# Altium PCB 原理图.PcbDoc
Units mil, origin at the board's own origin, x right, y up, seen from the top; angles counter-clockwise.
Board outline 4545 x 3980 mil, 2 copper layers (Top Layer, Bottom Layer); 26 components, 47 nets, 185 pads, 12 vias.
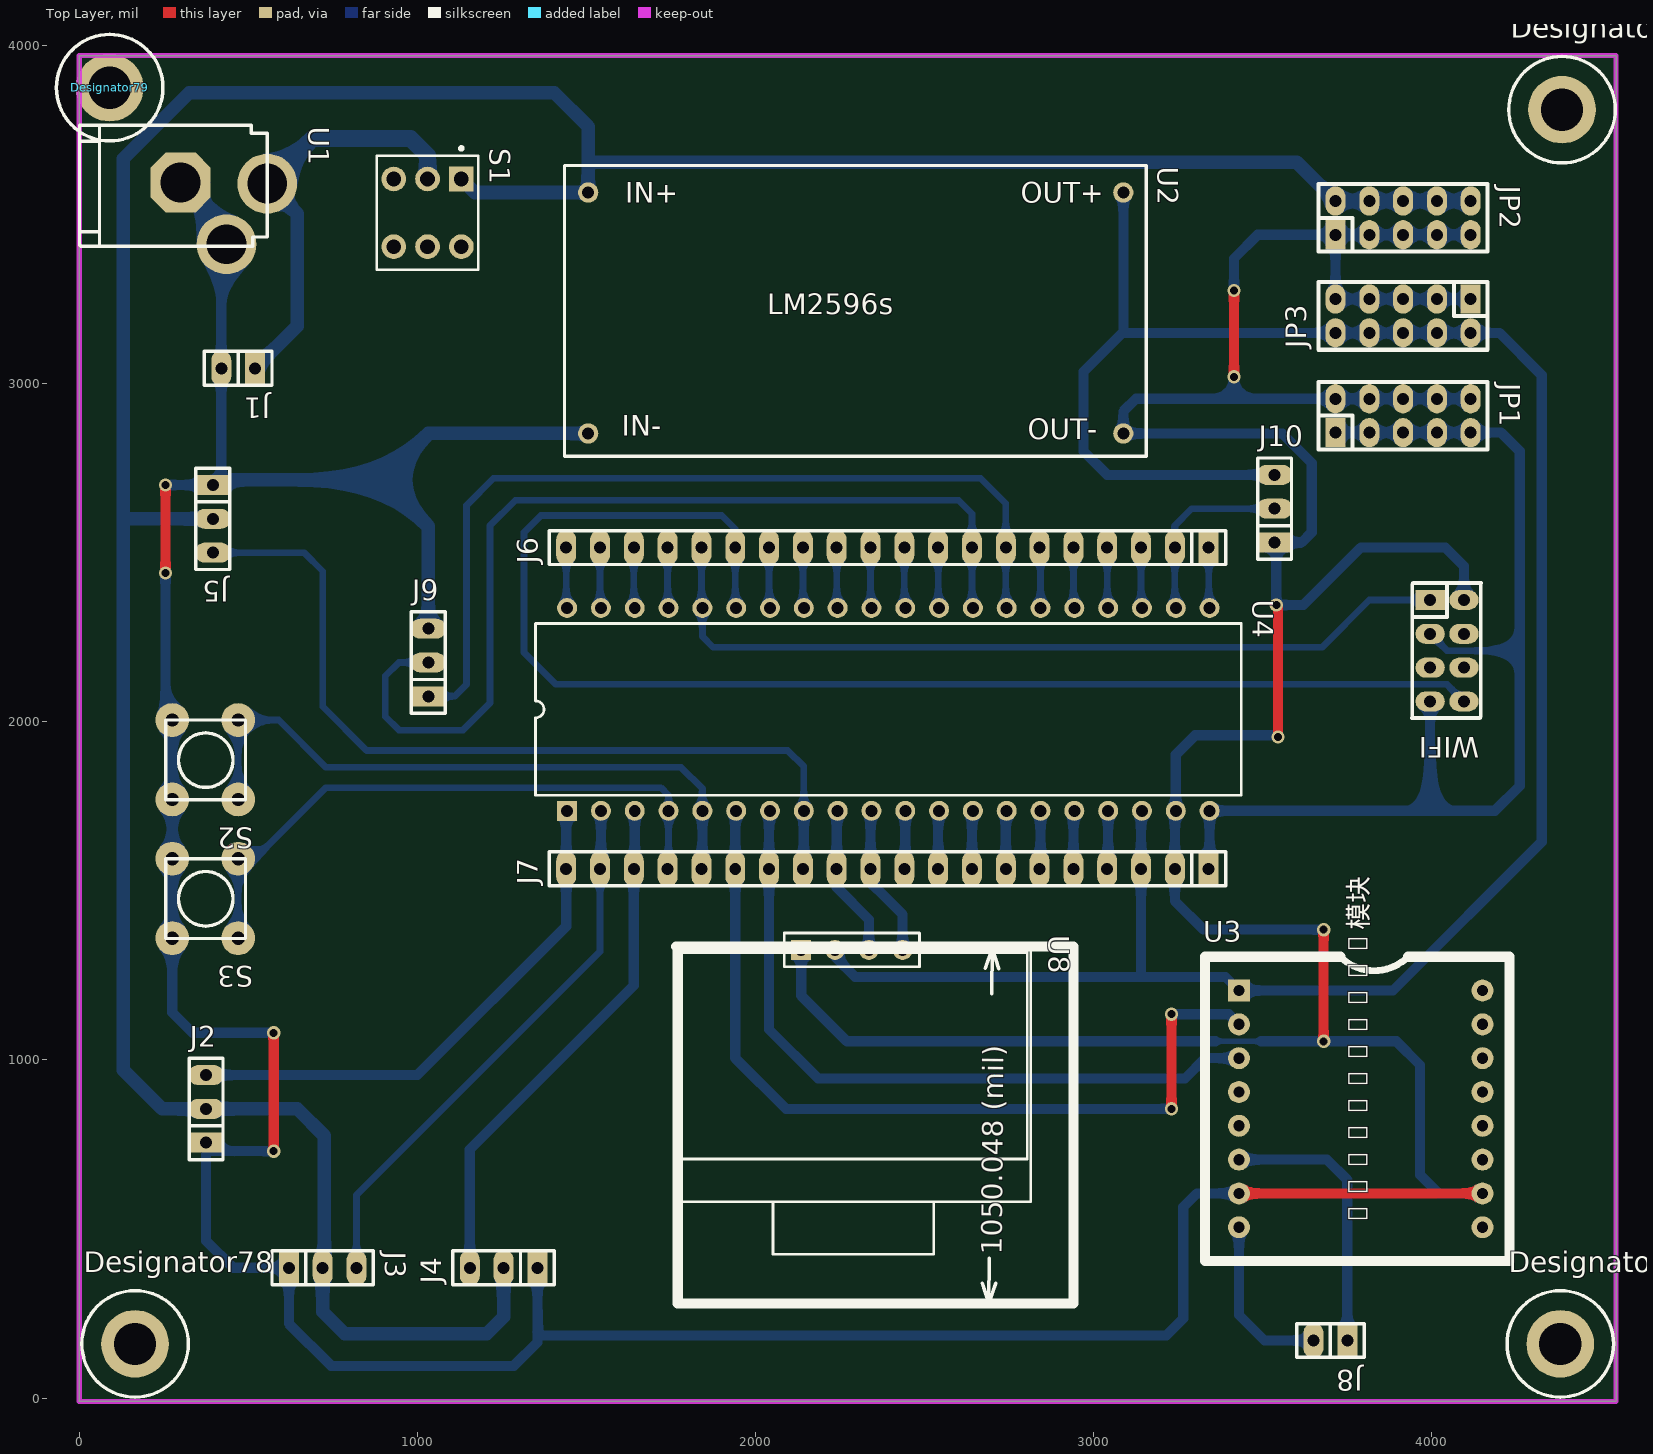
[diagram p0: Top Layer view]
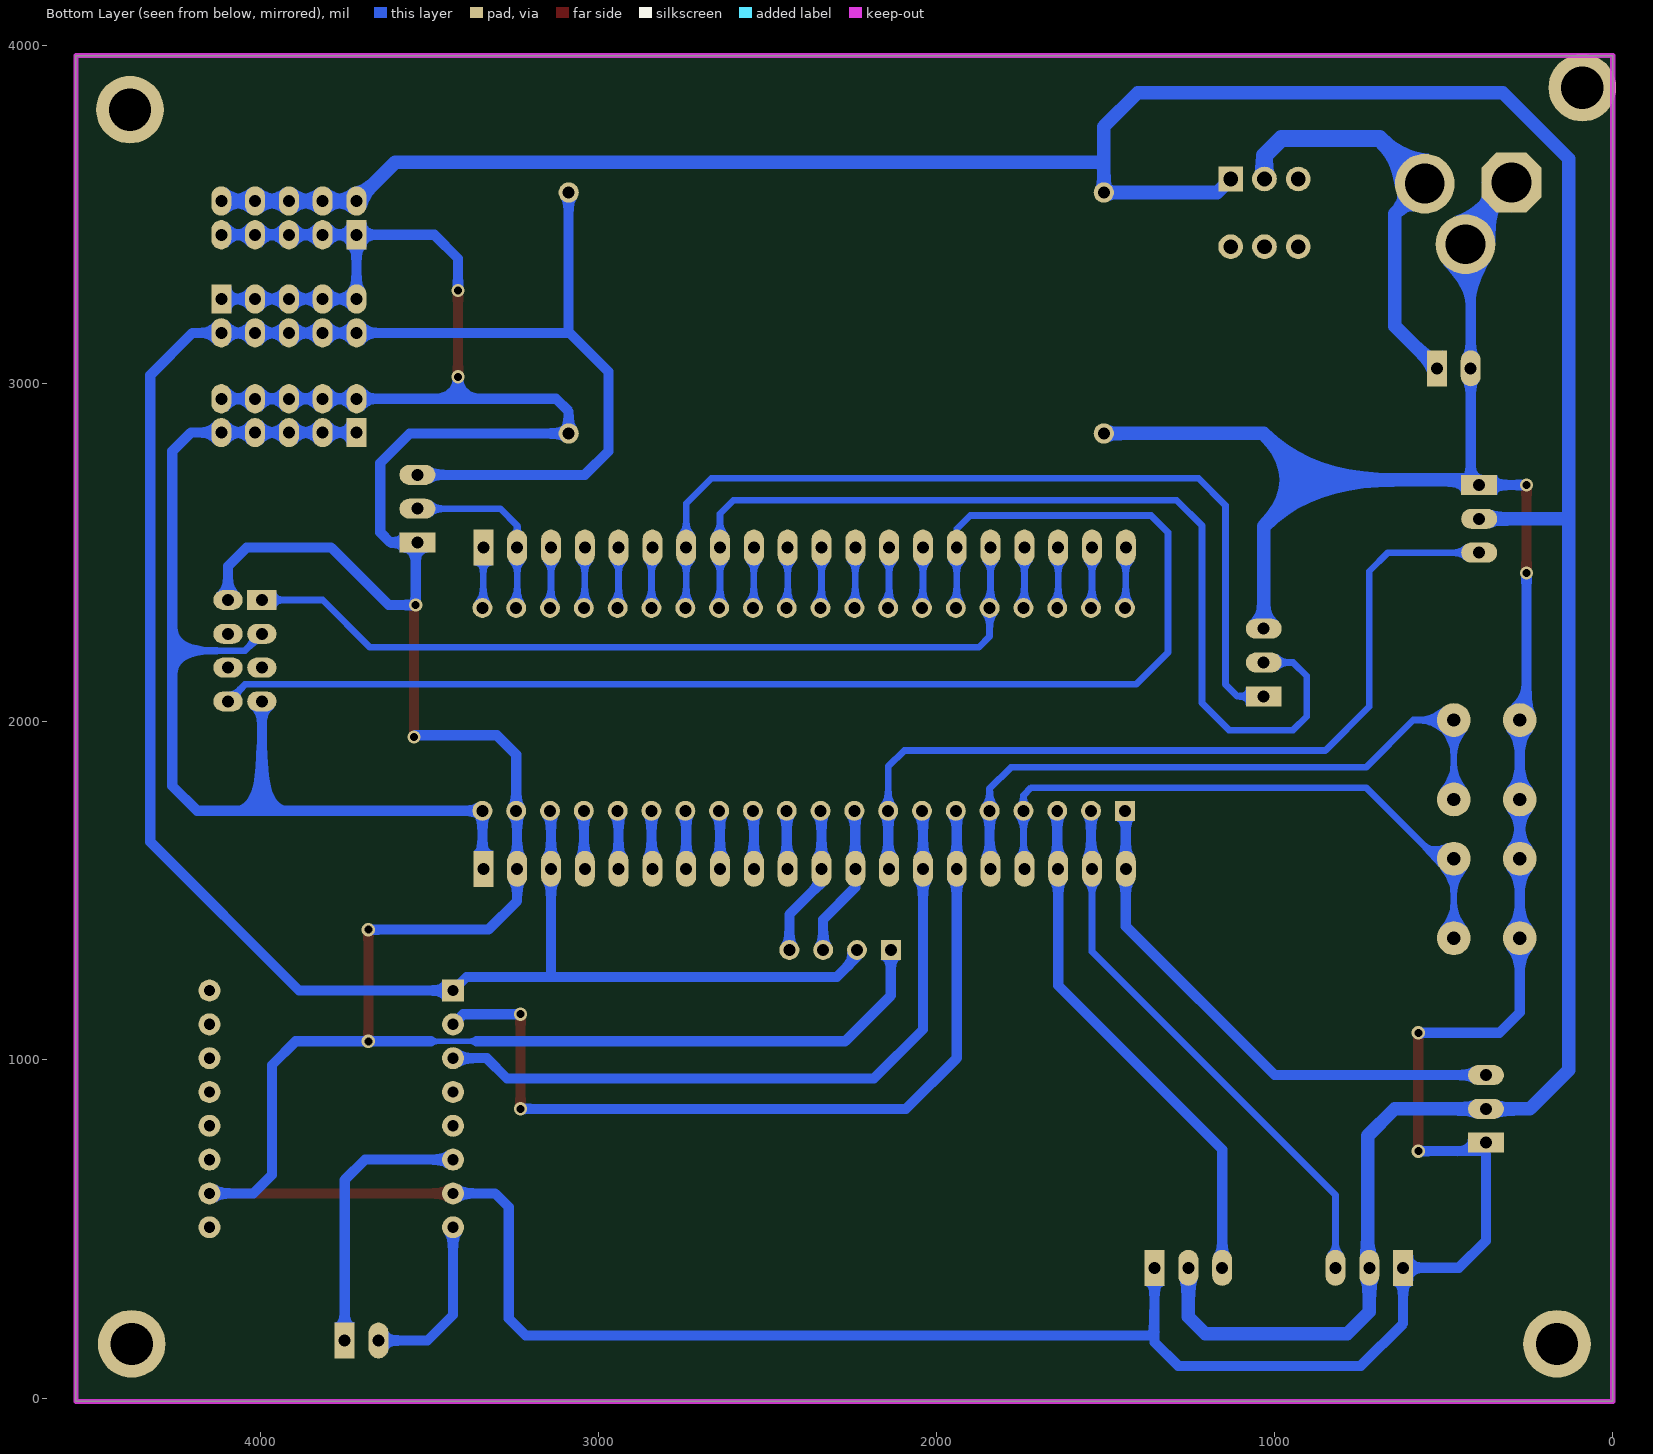
[diagram p1: Bottom Layer view, seen from below]

## Layer stack, top to bottom
Top Solder: solder mask 0.4, Solder Resist, Dk 3.5
Top Layer: signal copper 1.4
Dielectric 1: dielectric 12.6, FR-4, Dk 4.8
Bottom Layer: signal copper 1.4
Bottom Solder: solder mask 0.4, Solder Resist, Dk 3.5

## Board outline
0,-10 0,3970 4545,3970 4545,-10

## Design rules (kind name [scope] priority, off if disabled: settings)
Clearance futong [InPolygon] p1: gap=30
Clearance [All] p2: gap=10
PolygonConnect [All] p1: connectstyle=Relief reliefconductorwidth=10 reliefentries=4 polygonreliefangle="90 Angle" airgapwidth=10
RoutingVias [All] p1: holewidth=28 width=50 viastyle="Through Hole" minholewidth=28 minwidth=50 maxholewidth=28 maxwidth=50
SolderMaskExpansion [All] p1: expansion=4
Width [All] p1: maxlimit=50 minlimit=15 preferedwidth=30 minimp=50.000000 maximp=50.000000 favimp=50.000000
30 further rules are at their usual default settings.

## Components (designator, comment, footprint, x,y, rotation, side; value= is the part's Value field where it differs from the comment)
Designator76 "Comment" M3x4_L 4385,3810 r0 top
Designator77 "Comment" M3x4_L 4380,160 r0 top
Designator78 "Comment" M3x4_L 165,160 r0 top
Designator79 "Comment" M3x4_L 90,3875 r0 top
J1 "CON2" sip-2 520,3045 r180 top
J2 "CON3" sip-3 375,755 r90 top
J3 "CON3" sip-3 620,385 r0 top
J4 "CON3" sip-3 1355,385 r180 top
J5 "CON3" sip-3 395,2700 r270 top
J6 "CON20" sip-20 3340,2515 r180 top
J7 "CON20" sip-20 3340,1565 r180 top
J8 "CON2" sip-2 3750,170 r180 top
J9 "CON3" sip-3 1032.15,2075 r90 top
J10 "CON3" sip-3 3535,2530 r90 top
JP1 "HEADER 5X2" IDC-10 3715,2855 r0 top
JP2 "HEADER 5X2" IDC-10 3715,3440 r0 top
JP3 "HEADER 5X2" IDC-10 4115,3250 r180 top
S1 "SW-DPDT" SWITCH_B1 1030,3505 r270 top
S2 "SW-PB" SWPB 275,2005 r180 top
S3 "SW-PB" SWPB 275,1595 r180 top
U1 "VCCIN" VCCIN -4.57,3972.01 r0 top
U2 "LM2596模块" LM2596模块 1505,3565 r0 top
U3 "MiniMP3-16P模块" MiniMP3模块 3429.53,1205 r0 top
U4 "stm32c8t6" DIP-40 2392.76,2036.47 r0 top
U8 "OLED GND-VCC" "OLED-12864-0.96 模块" 2180,1325 r0 top
WIFI "HEADER 4X2" IDC-8 3995,2360 r270 top

## Footprints (in the part's own frame and the unit in brackets; to place one, negate y for a bottom-side part, rotate by r counter-clockwise, add the part's x,y. Pads: shape width x height; smd on the part's side, far side on the other; paste and mask are expansions set on the pad)
DIP-40 [mm] "51单片机"
  rect 1.5x1.5 hole 0.9: 1(-24.13,-7.62)
  round 1.5 hole 0.9: 2(-21.59,-7.62) 3(-19.05,-7.62) 4(-16.51,-7.62) 5(-13.97,-7.62) 6(-11.43,-7.62) 7(-8.89,-7.62) 8(-6.35,-7.62) 9(-3.81,-7.62) 10(-1.27,-7.62) 11(1.27,-7.62) 12(3.81,-7.62) 13(6.35,-7.62) 14(8.89,-7.62) 15(11.43,-7.62) 16(13.97,-7.62) 17(16.51,-7.62) 18(19.05,-7.62) 19(21.59,-7.62) 20(24.13,-7.62) 21(24.13,7.62) 22(21.59,7.62) 23(19.05,7.62) 24(16.51,7.62) 25(13.97,7.62) 26(11.43,7.62) 27(8.89,7.62) 28(6.35,7.62) 29(3.81,7.62) 30(1.27,7.62) 31(-1.27,7.62) 32(-3.81,7.62) 33(-6.35,7.62) 34(-8.89,7.62) 35(-11.43,7.62) 36(-13.97,7.62) 37(-16.51,7.62) 38(-19.05,7.62) 39(-21.59,7.62) 40(-24.13,7.62)
  silkscreen extent -26.5,-6.45 26.5,6.45, body extent -26.22,-7.74 26.23,7.75, height 5.7
IDC-8 [mm]
  rect 1.5x2.2 hole 0.9: 1(0,0)
  oval 1.5x2.2 hole 0.9: 2(0,2.54) 3(2.54,0) 4(2.54,2.54) 5(5.08,0) 6(5.08,2.54) 7(7.62,0) 8(7.62,2.54)
  silkscreen extent -1.27,-1.36 8.88,3.81
IDC-10 [mm]
  rect 1.5x2.2 hole 0.9: 1(0,0)
  oval 1.5x2.2 hole 0.9: 2(0,2.54) 3(2.54,0) 4(2.54,2.54) 5(5.08,0) 6(5.08,2.54) 7(7.62,0) 8(7.62,2.54) 9(10.16,0) 10(10.16,2.54)
  silkscreen extent -1.27,-1.27 11.43,3.81
LM2596模块 [mil]
  round 60 hole 36: 1(0,0) 2(0,-712.6) 3(1582.68,-712.6) 4(1582.68,0)
  silkscreen extent -70,-780 1650,80
M3x4_L [mil] "M3铜柱，长：4mm"
  round 200 hole 125: 1(0,0)
  silkscreen extent -157,-157 157,157, body extent -106,-93 106,93, height 159
MiniMP3模块 [mil]
  rect 65x65 hole 33.46: 1(0,0)
  round 65 hole 33.46: 2(0,-100) 3(0,-200) 4(0,-300) 5(0,-400) 6(0,-500) 7(0,-600) 8(0,-700) 9(720.47,-700) 10(720.47,-600) 11(720.47,-500) 12(720.47,-400) 13(720.47,-300) 14(720.47,-200) 15(720.47,-100) 16(720.47,0)
  silkscreen extent -100,-800 800,100
"OLED-12864-0.96 模块" [mm]
  rect 1.5x1.5 hole 0.9: 1(-1.143,0)
  round 1.5 hole 0.9: 2(1.397,0) 3(3.937,0) 4(6.477,0)
  silkscreen extent -10.54,-22.86 16.11,1.27, body extent -10.33,-22.81 16.69,1.32, height 2.54
sip-2 [mm]
  rect 1.5x2.7 hole 0.9: 1(0,0)
  oval 1.5x2.7 hole 0.9: 2(2.54,0)
  silkscreen extent -1.27,-1.27 3.81,1.27
sip-3 [mm]
  rect 1.5x2.7 hole 0.9: 1(0,0)
  oval 1.5x2.7 hole 0.9: 2(2.54,0) 3(5.08,0)
  silkscreen extent -1.27,-1.27 6.35,1.27
sip-20 [mm]
  rect 1.5x2.7 hole 0.9: 1(0,0)
  oval 1.5x2.7 hole 0.9: 2(2.54,0) 3(5.08,0) 4(7.62,0) 5(10.16,0) 6(12.7,0) 7(15.24,0) 8(17.78,0) 9(20.32,0) 10(22.86,0) 11(25.4,0) 12(27.94,0) 13(30.48,0) 14(33.02,0) 15(35.56,0) 16(38.1,0) 17(40.64,0) 18(43.18,0) 19(45.72,0) 20(48.26,0)
  silkscreen extent -1.27,-1.27 49.53,1.27
SWITCH_B1 [mm] "单刀"
  rect 1.85x1.85 hole 1.1: 1(-2.54,2.54)
  round 1.85 hole 1.1: 2(-2.54,0) 3(-2.54,-2.54) 4(2.54,-2.54) 5(2.54,0) 6(2.54,2.54)
  silkscreen extent -4.96,-3.81 4.28,3.81
SWPB [mil]
  round 100 hole 39.37: 1(-195,235) 2(0,235) 3(-195,0) 4(0,0)
  silkscreen extent -217,0 20,236
VCCIN [mm]
  oct 4.5x4.5 hole 3: 1(7.736,-9.576)
  round 4.5 hole 3: 2(14.236,-9.676) 3(11.176,-14.224)
  silkscreen extent 0.14,-14.38 14.24,-5.28

## Part data
J1 J2 J3 J4 J5 J6 J7 J8 J9 J10: "Connector"
S1: "单刀双掷开关"

## Via types
v1: diameter 39.37, hole 23.62, Top Layer to Bottom Layer, 12 vias

## Nets (pads, with @x,y where several pads share a name; then routed paths per layer and width w, separated by ;. In a path a pad name is that pad's centre, name@x,y a point inside that pad or via, vN(x,y) a via of type N, cw(c..) or ccw(c..) an arc to the next point about the centre after c; other vN are vias at no path point)
3V3: J7.1 JP1.1 JP1.3 JP1.5 JP1.7 JP1.9 U4.20 WIFI.3 WIFI.7 | length 3287.3
  Bottom Layer w20: WIFI.3 4045,2210 4260,2210
  Bottom Layer w30: J7.1 3342.76,1567.76 U4.20 3995,1736.47 ; JP1.1 JP1.3 JP1.5 JP1.7 JP1.9 4205,2855 4260,2800 4260,2210 4260,1810 4186.47,1736.47 3995,1736.47 ; WIFI.7 3995,1736.47
5V: J7.3 J10.3 JP3.2 JP3.4 JP3.6 JP3.8 JP3.10 U2.4 U3.1 U4.18 U8.2 | length 6905.2
  Bottom Layer w30: U8.2 2235,1305 2295,1245 3135,1245 ; 3087.68,3150 JP3.10 JP3.8 JP3.6 JP3.4 JP3.2 4200,3150 4325,3025 4325,1645 3885,1205 U3.1 3389.53,1245 3135,1245 ; U2.4 3087.68,3152.68 2970,3035 2970,2800 3040,2730 J10.3 ; U4.18 3140,1733.72 J7.3 3140,1250 3135,1245
12V: J2.2 J3.2 J4.2 J5.2 JP2.2 JP2.4 JP2.6 JP2.8 JP2.10 S1.1 U2.1 | length 9635.2
  Bottom Layer w40: J5.2 135,2600 130,2595 ; S1.1 1170,3565 U2.1 1505,3640 ; J4.2 1255,240 1205,190 785,190 720,255 J3.2 725,390 725,775 645,855 J2.2 245,855 130,970 130,2595 ; JP2.10 JP2.8 JP2.6 JP2.4 JP2.2 3600,3655 1520,3655 1505,3640 ; 130,2595 130,3665 325,3860 1405,3860 1505,3760 1505,3640
A8: J7.16 S2.1 S2.3 U4.5 | length 1930.1
  Bottom Layer w20: S2.1 S2.3 590,2005 730,1865 1780,1865 1842.76,1802.24 U4.5
  Bottom Layer w30: J7.16 1842.76,1567.76 U4.5
B15: J7.17 S3.1 S3.3 U4.4 | length 1822.6
  Bottom Layer w20: S3.1 S3.3 520,1595 730,1805 1720,1805 1742.76,1782.24 U4.4 1742.76,1567.76 J7.17
DATA: J6.2 J10.2 U4.22 | length 557.8
  Bottom Layer w20: U4.22@3245,2340 3240,2345 J6.2 3240,2580 3290,2630 J10.2
GND: J1.2 J2.1 J3.1 J4.1 J5.1 J7.2 J9.3 J10.1 JP1.2 JP1.4 JP1.6 JP1.8 JP1.10 JP2.1 JP2.3 JP2.5 JP2.7 JP2.9 JP3.1 JP3.3 JP3.5 JP3.7 JP3.9 S2.2 S2.4 S3.2 S3.4 U1.1 U1.3 U2.2 U2.3 U3.7 U3.10 U4.19 U8.1 WIFI.2 | length 19376.7
  Top Layer w30: v1(255,2440) v1(255,2700) ; v1(575,730) v1(575,1080) ; v1(3415,3020) v1(3415,3275) ; U3.7 U3.10 ; v1(3540,2345) 3545,2340 v1(3545,1955) ; v1(3680,1055) v1(3680,1385)
  Bottom Layer w15: 3360,1055 3495,1055
  Bottom Layer w30: v1(255,2440) 255,2025 S2.4 S2.2 S3.4 S3.2 275,1140 335,1080 v1(575,1080) ; v1(255,2700) J5.1 ; J5.1@410,2715 420,2725 J1.2 420,3396.57 U1.3 ; v1(575,730) 385,730 375,720 375,465 455,385 J3.1 620,220 745,95 1285,95 1355,165 1355,195 ; J4.1 1355,195 ; U8.1 2135,1190 2270,1055 3360,1055 ; v1(3415,3020) 3415,2955 ; v1(3415,3275) 3415,3370 3485,3440 JP2.1 ; U3.7 3305,605 3265,565 3265,235 3215,185 1365,185 1355,195 ; 3495,1055 3895,1055 3965,985 3965,660 4020,605 U3.10 ; v1(3545,1955) 3540,1960 3300,1960 3242.76,1902.76 U4.19 3240,1733.72 J7.2 3240,1470 3325,1385 v1(3680,1385) ; WIFI.2 4095,2460 4040,2515 3790,2515 3620,2345 v1(3540,2345) 3540,2525 J10.1 3615,2530 3645,2560 3645,2765 3557.6,2852.4 U2.3 3087.68,2917.68 3125,2955 3415,2955 ; JP1.10 JP1.8 JP1.6 JP1.4 JP1.2 3415,2955 ; JP3.1 JP3.3 JP3.5 JP3.7 JP3.9 JP2.1 ; JP2.9 JP2.7 JP2.5 JP2.3 JP2.1
  Bottom Layer w40: J5.1 410,2715 895,2715 ; J9.3 J9.3@1032.15,2297.85 ; J9.3@1055,2275 J9.3@1032.15,2297.85 ; U2.2 1032.4,2852.4 895,2715 ; 895,2715 1032.15,2577.85 J9.3@1032.15,2297.85
  Bottom Layer w50: U1.1 435.43,3459.57 U1.3
IO0: WIFI.6
IO2: WIFI.4
NetJ1_1: J1.1 S1.2 U1.2 | length 1255
  Bottom Layer w40: J1.1 645,3170 645,3501.97 U1.2
  Bottom Layer w50: U1.2 689.84,3725 980,3725 1030,3675 S1.2
NetJ6_1: J6.1 U4.21 | length 177.1
  Bottom Layer w20: J6.1 3340,2345 U4.21@3345,2340
NetJ6_3: J6.3 U4.23 | length 175
  Bottom Layer w20: U4.23@3140,2340 J6.3
NetJ6_4: J6.4 U4.24 | length 179.7
  Bottom Layer w20: J6.4 3040,2339.23 U4.24
NetJ6_5: J6.5 U4.25 | length 181.2
  Bottom Layer w20: J6.5 2940,2355 U4.25@2955,2340
NetJ6_6: J6.6 U4.26 | length 179.7
  Bottom Layer w20: J6.6 2842.76,2512.24 U4.26
NetJ6_9: J6.9 U4.29 | length 179.7
  Bottom Layer w20: J6.9 2540,2339.23 U4.29
NetJ6_10: J6.10 U4.30 | length 179.7
  Bottom Layer w20: J6.10 2440,2339.23 U4.30
NetJ6_11: J6.11 U4.31 | length 179.7
  Bottom Layer w20: J6.11 2340,2339.23 U4.31
NetJ6_12: J6.12 U4.32 | length 179.7
  Bottom Layer w20: J6.12 2240,2339.23 U4.32
NetJ6_13: J6.13 U4.33 | length 179.7
  Bottom Layer w20: J6.13 2140,2339.23 U4.33
NetJ6_14: J6.14 U4.34 | length 179.7
  Bottom Layer w20: J6.14 2040,2339.23 U4.34
NetJ6_17: J6.17 U4.37 | length 179.7
  Bottom Layer w20: J6.17 1740,2339.23 U4.37
NetJ6_18: J6.18 U4.38 | length 179.7
  Bottom Layer w20: J6.18 1640,2339.23 U4.38
NetJ6_19: J6.19 U4.39 | length 179.7
  Bottom Layer w20: J6.19 1540,2339.23 U4.39
NetJ6_20: J6.20 U4.40 | length 179.7
  Bottom Layer w20: J6.20 1440,2339.23 U4.40
NetJ7_4: J7.4 U4.17 | length 172.6
  Bottom Layer w30: J7.4 3042.76,1567.76 U4.17
NetJ7_5: J7.5 U4.16 | length 172.6
  Bottom Layer w30: J7.5 2940,1733.72 U4.16
NetJ7_6: J7.6 U4.15 | length 172.6
  Bottom Layer w30: J7.6 2842.76,1567.76 U4.15
NetJ7_7: J7.7 U4.14 | length 172.6
  Bottom Layer w30: J7.7 2740,1733.72 U4.14
NetJ7_8: J7.8 U4.13 | length 172.6
  Bottom Layer w30: J7.8 2640,1733.72 U4.13
NetJ7_9: J7.9 U4.12 | length 172.6
  Bottom Layer w30: J7.9 2540,1733.72 U4.12
NetJ7_10: J7.10 U4.11 | length 172.6
  Bottom Layer w30: J7.10 2442.76,1567.76 U4.11
NetJ8_1: J8.1 U3.6 | length 820.3
  Bottom Layer w30: U3.6 3690,705 3750,645 J8.1
NetJ8_2: J8.2 U3.8 | length 511.3
  Bottom Layer w30: U3.8 3429.53,245.47 3505,170 J8.2
RELAY1: J2.3 J7.20 U4.1 | length 1589.9
  Bottom Layer w30: J2.3 1000,955 1440,1395 J7.20 1440,1733.72 U4.1
RELAY2: J3.3 J7.19 U4.2 | length 1650.8
  Bottom Layer w20: J3.3 820,600 1540,1320 J7.19
  Bottom Layer w30: J7.19 1542.76,1567.76 U4.2
RELAY3: J4.3 J7.18 U4.3 | length 1553.5
  Bottom Layer w30: J4.3 1155,735 1640,1220 J7.18 1642.76,1567.76 U4.3
RELAY4: J5.3 J7.13 U4.8 | length 2565.8
  Bottom Layer w20: J5.3 665,2500 720,2445 720,2045 850,1915 2095,1915 2142.76,1867.24 U4.8
  Bottom Layer w30: J7.13@2127.11,1552.11 J7.13 2142.76,1567.76 U4.8
RST: WIFI.5
SCL: J7.11 U4.10 U8.4 | length 452
  Bottom Layer w30: U4.10 2340,1733.72 J7.11 2340,1525 2435,1430 U8.4
SDA: J7.12 U4.9 U8.3 | length 452
  Bottom Layer w30: U4.9 2240,1733.72 J7.12 2240,1510 2335,1415 U8.3
U1RX: J7.14 U3.3 U4.7 | length 2122.1
  Bottom Layer w30: U4.7 2040,1733.72 J7.14 2040,1090 2185,945 3270,945 3330,1005 U3.3
U1TX: J7.15 U3.2 U4.6 | length 2576.7
  Top Layer w30: v1(3230,855) v1(3230,1135)
  Bottom Layer w30: U4.6 1940,1733.72 J7.15 1940,1005 2090,855 v1(3230,855) ; v1(3230,1135) 3399.53,1135 U3.2
U2RX: J6.8 J9.2 U4.28 | length 2900.7
  Bottom Layer w20: J9.2 945,2175 905,2135 905,2015 945,1975 1135,1975 1215,2055 1215,2580 1290,2655 2600,2655 2640,2615 J6.8 2640,2339.23 U4.28
U2TX: J6.7 J9.1 U4.27 | length 2626.2
  Bottom Layer w20: J9.1 1110,2075 1145,2110 1145,2640 1225,2720 2665,2720 2740,2645 J6.7 2740,2339.23 U4.27
WIFI_RX: J6.15 U4.35 WIFI.8 | length 4092
  Bottom Layer w20: U4.35 1940,2339.23 J6.15 1940,2570 1900,2610 1365,2610 1315,2560 1315,2205 1409.53,2110.47 4044.53,2110.47 WIFI.8
WIFI_TX: J6.16 U4.36 WIFI.1 | length 2487.5
  Bottom Layer w20: J6.16 1840,2339.23 U4.36 1842.76,2252.24 1875,2220 3675,2220 3815,2360 WIFI.1
pads on no net: Designator76.1 Designator77.1 Designator78.1 Designator79.1 S1.3 S1.4 S1.5 S1.6 U3.4 U3.5 U3.9 U3.11 U3.12 U3.13 U3.14 U3.15 U3.16

## Keep-outs
Keep-Out Layer:
  the board outline again, w15

## Silkscreen, mask and mechanical layers (free items; w line width, h text height)
Top Overlay:
  lines w10: 2670.57,340.19 2690,280 ; 2679.43,1270.19 2700,1330 ; 2680,280.1 2700,279.9 ; 2690,1330.1 2710,1329.9 ; 2691.28,414.14 2690,280 ; 2698.72,1195.86 2700,1330 ; 2710.57,339.81 2690,280 ; 2719.43,1269.81 2700,1330
  lines w30: 1764.88,1335.17 1770,1335.17 ; 1770,1335.17 1770,280 2940,280 2940,1335.17 1770,1335.17
  text "1050.048 (mil)" at 2727.36,423.8 h60 r89.45

## Text inside footprints (layer, text, board x,y; h text height)
U2: Top Overlay "IN+" at 1615,3535 h60; Top Overlay "IN-" at 1605,2845 h60; Top Overlay "OUT+" at 2785,3535 h60; Top Overlay "OUT-" at 2805,2835 h60; Top Overlay "LM2596s" at 2035,3205 h60
U3: Top Overlay "16P-MiniMP3模块" at 3829.53,505 h100 r90